# Altium PCB PCBDesign.PcbDoc
Units mm, origin at the board's own origin, x right, y up, seen from the top; angles counter-clockwise.
Board outline 23 x 12.75 mm, 2 copper layers (Top Layer, Bottom Layer); 9 components, 5 nets, 22 pads, 16 vias.
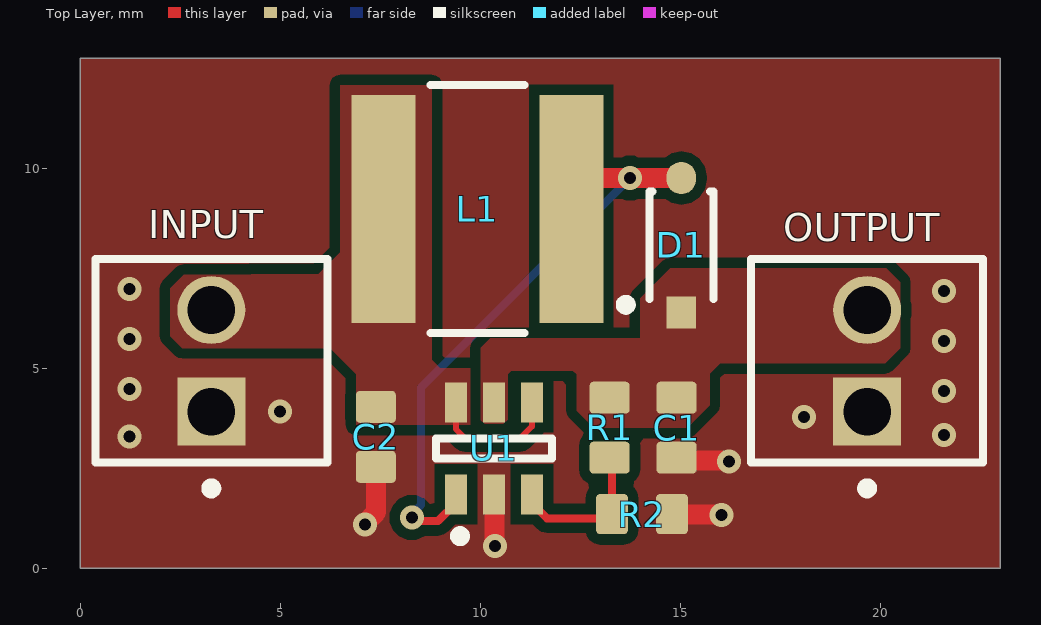
[diagram p0: Top Layer view]
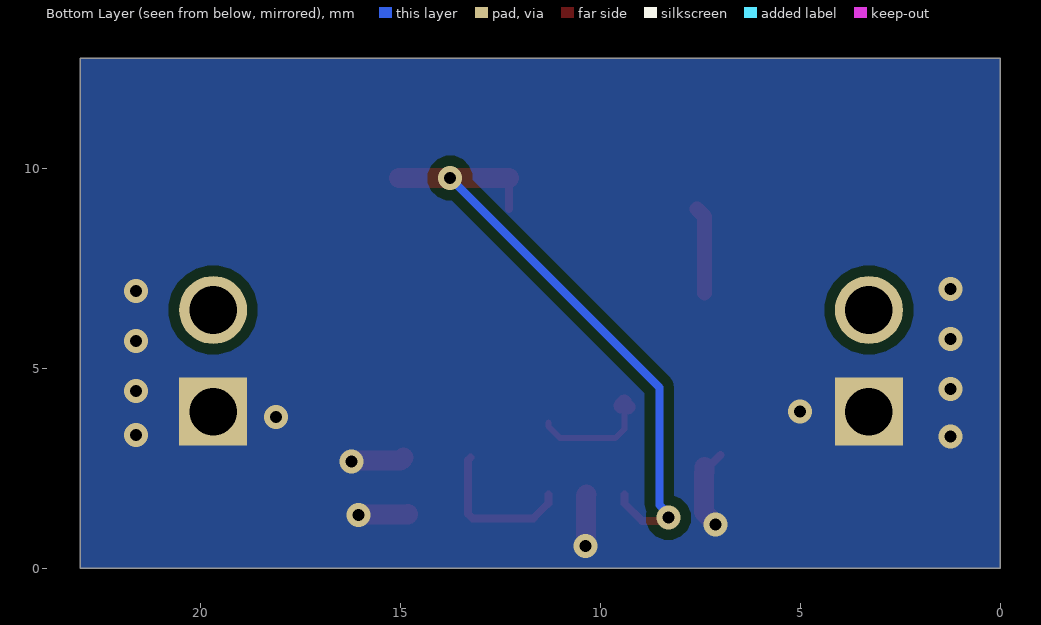
[diagram p1: Bottom Layer view, seen from below]
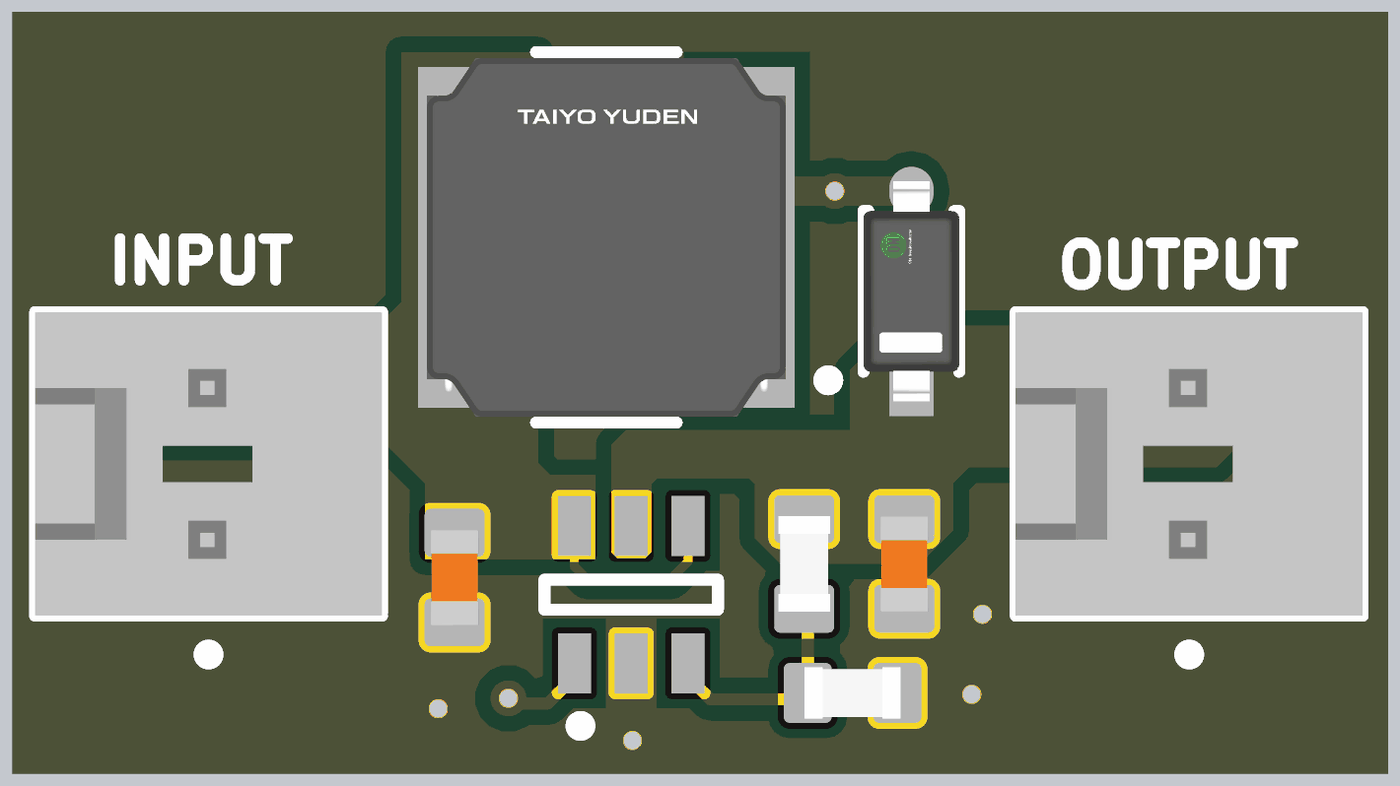
[diagram p2: 3D render of the assembled board from above, using the file's embedded part models]

## Layer stack, top to bottom
Top Solder: solder mask 0.0102, Solder Resist, Dk 3.5
Top Layer: signal copper 0.0356
Dielectric 1: dielectric 0.32, FR-4, Dk 4.8
Bottom Layer: signal copper 0.0356
Bottom Solder: solder mask 0.0102, Solder Resist, Dk 3.5

## Board outline
0,0 23,0 23,12.75 0,12.75

## Design rules (kind name [scope] priority, off if disabled: settings)
Clearance Clearance_1 [OnMid vs OnMid] p1: gap=0.254 ignorepadtopadclearanceinfootprint=FALSE except(0: Arc-Hole Track-Hole SMDPad-Hole THPad-Hole Via-Hole Fill-Hole Poly-Hole Region-Hole Text-Hole) sourcerule=38 cellrowname=All cellrowtype=0 cellcolname=All cellcoltype=0 innerlayers=TRUE
Clearance Clearance_2 [(ExistsOnLayer('Top Layer') Or ExistsOnLayer('Bottom Layer')) vs (ExistsOnLayer('Top Layer') Or ExistsOnLayer('Bottom Layer'))] p2: gap=0.254 ignorepadtopadclearanceinfootprint=FALSE except(0: Arc-Hole Track-Hole SMDPad-Hole THPad-Hole Via-Hole Fill-Hole Poly-Hole Region-Hole Text-Hole) sourcerule=38 cellrowname=All cellrowtype=0 cellcolname=All cellcoltype=0 outerlayers=TRUE
Clearance [All] p3: gap=0.254 ignorepadtopadclearanceinfootprint=FALSE except(0: Arc-Hole Track-Hole SMDPad-Hole THPad-Hole Via-Hole Fill-Hole Poly-Hole Region-Hole Text-Hole)
MinimumSolderMaskSliver [All] p1: minsoldermaskwidth=0.16
PolygonConnect [All] p1: connectstyle=Direct reliefconductorwidth=0.254 reliefentries=4 polygonreliefangle="90 Angle" airgapwidth=0.254
RoutingVias RoutingViaStyle_1 [All] p1: holewidth=0.3 width=0.6 viastyle="Through Hole" minholewidth=0.3 minwidth=0.6 maxholewidth=0.3 maxwidth=0.6
RoutingVias [All] p2: holewidth=0.711 width=1.27 viastyle="Through Hole" minholewidth=0.711 minwidth=1.27 maxholewidth=0.711 maxwidth=1.27
SilkToSilkClearance [All] p1: silktosilkclearance=0.16
SolderMaskExpansion [All] p1: expansion=0.102 istentingtop=FALSE
Width MaxMinWidth_1 [All] p1: maxlimit=1 minlimit=0.15 preferedwidth=0.2 minimp=50.000000 maximp=50.000000 favimp=50.000000
Width [All] p2: maxlimit=0.254 minlimit=0.254 preferedwidth=0.254
28 further rules are at their usual default settings.

## Components (designator, comment, footprint, x,y, rotation, side; value= is the part's Value field where it differs from the comment)
C1 "CAP_0603" CAP_0603 14.911,3.511 r90 top
C2 "10uF" CAP_0603 7.393,3.281 r90 top
D1 "MBR0520LT1G" FP-425-04-IPC_C 15.03,8.072 r90 top
INPUT "22-27-2021" MOLX-22-27-2021_V 3.28,5.184 r90 top (schematic designator P1)
L1 "NR6020T220M" FP-NR6020-MFG 9.93,8.975 r0 top
OUTPUT "22-27-2021" MOLX-22-27-2021_V 19.675,5.184 r90 top (schematic designator P2)
R1 "RES_0603" RES_0603 13.238,3.511 r90 top
R2 "RES_0603" RES_0603 14.047,1.351 r0 top
U1 "LTC3429ES6#TRMPBF" LT-S6-6-TSOT-23_L 10.346,2.996 r90 top

## Footprints (in the part's own frame and the unit in brackets; to place one, negate y for a bottom-side part, rotate by r counter-clockwise, add the part's x,y. Pads: shape width x height; smd on the part's side, far side on the other; paste and mask are expansions set on the pad)
CAP_0603 [mm]
  rrect25% 0.8x1 smd: 1(-0.75,0) 2(0.75,0)
  body extent -0.8,-0.4 0.8,0.4, height 0.51
FP-425-04-IPC_C [mm]
  rect 0.808x0.742 smd paste+0 mask+0: 1(-1.68,0)
  rrect100% 0.808x0.742 smd paste+0 mask+0: 2(1.68,0)
  silkscreen extent -1.61,-0.8 1.35,1.51, body extent -2.18,-0.9 2.18,0.9, height 0.25
FP-NR6020-MFG [mm]
  rect 1.6x5.7 smd paste+0 mask+0: 1(-2.35,0) 2(2.35,0)
  silkscreen extent -1.17,-3.1 1.17,3.1, body extent -3.25,-3.2 3.25,3.2, height 0.25
LT-S6-6-TSOT-23_L [mm] "SOT23, 6-Leads, Body 2.9x1.75mm, Pitch 0.95mm, IPC High Density"
  rect 1x0.55 smd: 1(-1.15,0.95) 2(-1.15,0) 3(-1.15,-0.95) 4(1.15,-0.95) 5(1.15,0) 6(1.15,0.95)
  silkscreen extent -2.32,-1.45 0.25,1.45, body extent -0.87,-1.45 0.87,1.45, height 1
MOLX-22-27-2021_V [mm] "Header, 2-Leads, Body 5.8x5.08mm"
  rect 1.7x1.7 hole 1.19: 1(-1.27,0)
  round 1.7 hole 1.19: 2(1.27,0)
  silkscreen extent -3.31,-2.9 2.54,2.9, body extent -2.54,-2.9 2.54,2.9, height 11.72
RES_0603 [mm]
  rrect25% 0.8x1 smd: 1(-0.75,0) 2(0.75,0)
  body extent -0.8,-0.43 0.8,0.43, height 0.52

## Part data
C1 C2: library part CMP-001-00087-1, "Capacitor SMD 0603", Design Item ID=CAP_0603, Source=Schematic-Lib-PhilsLab.SchLib
D1: library part CMP-1055-00425-2, "DIODE SCHOTTKY 20V 500MA SOD123", Average Rectified Current=500mA, Case/Package=SOD-123-2, Forward Voltage=385mV, Max Forward Surge Current (Ifsm)=5.5A, Max Operating Temperature=125°C, Max Repetitive Reverse Voltage (Vrrm)=20V, Max Reverse Leakage Current=250uA, Min Operating Temperature=-65°C, Package Quantity=3000, Contact Plating=Tin, Current Rating=500mA, Element Configuration=Single, Forward Current=500mA, Height=1.12mm, Lead Free="Lead Free", Length=2.69mm, Max Reverse Voltage (DC)=20V, Max Surge Current=5.5A, Number of Pins=2, Output Current=500mA, Packaging="Tape and Reel", Peak Non-Repetitive Surge Current=5.5A, Peak Reverse Current=250uA, Polarity=Standard, Radiation Hardening=No, REACH SVHC="No SVHC", Termination=SMD/SMT, Voltage Rating (DC)=20V, Width=1.6mm
INPUT OUTPUT: library part CMP-2000-05537-1, "Male Header, Pitch 2.54 mm, 1 x 2 Position, Height 11.7 mm, Tail Length 3.56 mm, 0 to 75 degC, RoHS, Bulk", Current - Max=4A, Manufacturer=Molex, Operating Temperature=0°Cto+75°C, Package Description="2-Leads Header, Body 5.08 x 5.8 mm, Pitch 2.54 mm", Package Version="Rev. BC, 02/2012", PartNumber=0022272021, Voltage - Max=250V, Contact Material=Tinplatedbrass, Current Rating=4A, Datasheet URL=http://www.molex.com/pdm_docs/sd/022272021_sd.pdf, Datasheet Version="Rev. F, 06/2009", Housing material=Nylon(UL94V-0), Manufacturer URL=http://www.molex.com/, Mounting Technology=ThroughHole, No. of Positions=2, No. of Rows=1, Orientation=Vertical, Package Reference=22-27-2021, Pitch=2.54mm, Voltage rating=250V
L1: library part CMP-14484-001459-1, "SMD Power Inductors 22uH ±20% 0.95A 0.348Ω", Case/Package=Nonstandard, Current Rating=950mA, DC Resistance (DCR)=348mR, Inductance=22uH, Max DC Current=1.05A, Max Operating Temperature=120°C, Min Operating Temperature=-25°C, Package Quantity=2500, Resistor Type=Wirewound, Self Resonant Frequency=11MHz, Test Frequency=100kHz, Tolerance=20%, Core Material=Ferrite, Depth=6.2mm, Halogen Free="Halogen Free", Height=2mm, Height - Seated (Max)=0.079inch, Lead Free="Lead Free", Length=0.236inch, Mount="Surface Mount", Packaging="Tape and Reel", Radiation Hardening=No, RoHS Compliant=Yes, Saturation Current=1.05A, Series=NR, Shielding=Shielded, Termination=SMD/SMT, Width=6mm
R1 R2: library part CMP-009-00183-1, "Resistor SMD 0603", Design Item ID=RES_0603, Source=Schematic-Lib-PhilsLab.SchLib
U1: library part CMP-0492-01773-1, "600 mA, 500 kHz Micropower Synchronous Boost Converter with Output Disconnect, 6-pin SOT23 (S6-6), -40 to 85 degC, Pb-Free, Mini Tape and Reel", Manufacturer="Linear Technology", Code_JEDEC=MO-193, ComponentLink1Description="Manufacturer URL", ComponentLink1URL=http://www.linear.com/, ComponentLink2Description=Datasheet, ComponentLink2URL=http://cds.linear.com/docs/en/datasheet/3429fa.pdf, ComponentLink3Description="Package Specification", ComponentLink3URL=http://cds.linear.com/docs/en/packaging/SOT_6_05-08-1636.pdf, DatasheetVersion="Rev. A", Mounting Technology="Surface Mount", Number of Outputs=1, PackageDescription="6-Pin Plastic TSOT-23, Body 2.9 x 1.63 mm, Pitch 0.95 mm", PackageReference=S6-6, PackageVersion=Jun-10, Packing="Mini Tape and Reel", PartNumber=LTC3429ES6#TRMPBF, RoHS=TRUE

## Via types
v1: diameter 0.6, hole 0.3, Top Layer to Bottom Layer, tented both sides, 16 vias

## Nets (pads, with @x,y where several pads share a name; then routed paths per layer and width w, separated by ;. In a path a pad name is that pad's centre, name@x,y a point inside that pad or via, vN(x,y) a via of type N, cw(c..) or ccw(c..) an arc to the next point about the centre after c; other vN are vias at no path point)
FB: R1.1 R2.1 U1.3 | length 3.9
  Top Layer w0.2: U1.3 11.296,1.621 11.671,1.246 13.192,1.246 R2.1 13.297,2.701 R1.1
GND: C1.1 C2.1 INPUT.1 OUTPUT.1 R2.2 U1.2 | length 6.1
  Top Layer w0.2: C2.1@6.993,2.831 7.293,2.531 C2.1 ; U1.2 U1.2@10.359,1.833
  Top Layer w0.5: INPUT.1 INPUT.1@3.284,3.91 ; v1(7.12,1.088) 7.12,1.115 7.402,1.397 7.402,2.381 7.393,2.39 C2.1 ; U1.2@10.336,1.837 10.356,1.817 10.356,0.566 v1(10.366,0.556) ; R2.2 14.809,1.339 16.027,1.339 v1(16.039,1.327) ; C1.1 14.984,2.687 16.199,2.687 v1(16.218,2.668) ; OUTPUT.1@19.582,3.822 OUTPUT.1
  other v1: 1.235,3.295 21.601,3.324 18.102,3.777 4.998,3.91 21.601,4.422 1.235,4.48 21.601,5.672 1.235,5.73 21.601,6.922 1.235,6.98
INPUT: C2.2 INPUT.2 L1.1 U1.4 U1.6 | length 5.3
  Top Layer w0.15: U1.6 9.396,4.116 9.396,3.472 9.618,3.25 11,3.25 11.296,3.546 11.296,3.646
  Top Layer w0.381: L1.1@7.393,6.876 7.393,8.788 L1.1 ; U1.6@9.311,4.031 U1.6@9.396,4.116 ; U1.6 U1.6@9.48,4.062
OUTPUT: C1.2 D1.1 OUTPUT.2 R1.2 U1.5
SW: D1.2 L1.2 U1.1 | length 15.8
  Top Layer w0.2: v1(8.293,1.262) 8.401,1.262 8.488,1.174 8.948,1.174 9.396,1.621 U1.1 ; L1.2 L1.2@12.28,9.75
  Top Layer w0.5: L1.2@12.28,9.75 v1(13.75,9.75) ; v1@13.751,9.751 D1.2@15.029,9.751
  Bottom Layer w0.2: v1(8.293,1.262) 8.293,1.353 8.519,1.579 8.519,4.519 v1(13.75,9.75)

## Polygon pours and split planes (outlines as drawn)
OUTPUT on Top Layer "OUTPUT_L01_P001" (solid, remove dead copper, pour order 1): 20.5,7.15 20.5,5.5 20.123,5.123 15.997,5.123 15.736,4.861 15.736,4.073 15.174,3.511 12.839,3.511 12.413,3.937 12.413,4.844 12.319,4.937 10.777,4.937 10.686,4.847 10.686,3.712 10.579,3.605 10.112,3.605 10.014,3.703 10.014,5.514 10.25,5.75 14,5.75 14,6.75 14.75,7.5 20.15,7.5
INPUT on Top Layer "INPUT_L01_P000" (solid, remove dead copper, pour order 0): 2.25,6.999 2.25,5.8 2.55,5.5 6.25,5.5 6.899,4.851 6.899,3.582 9.742,3.582 9.75,3.575 9.75,5 9,5 8.795,5.205 8.795,12.075 6.5,12.075 6.5,7.901 5.961,7.359 2.587,7.339
GND on Top Layer "GND_L01_P007" (solid, remove dead copper, pour order 7): 0,0 23,0 23,12.75 0,12.75
GND on Bottom Layer "GND_L02_P002" (solid, remove dead copper, pour order 2): 0,0 23,0 23,12.75 0,12.75